# Altium PCB Stm32.PcbDoc
Units mm, origin at the board's own origin, x right, y up, seen from the top; angles counter-clockwise.
Board outline 45.1 x 45.1 mm, 2 copper layers (Top Layer, Bottom Layer); 38 components, 25 nets, 181 pads, 50 vias.
Unrouted connection lines stored in the file: 7.
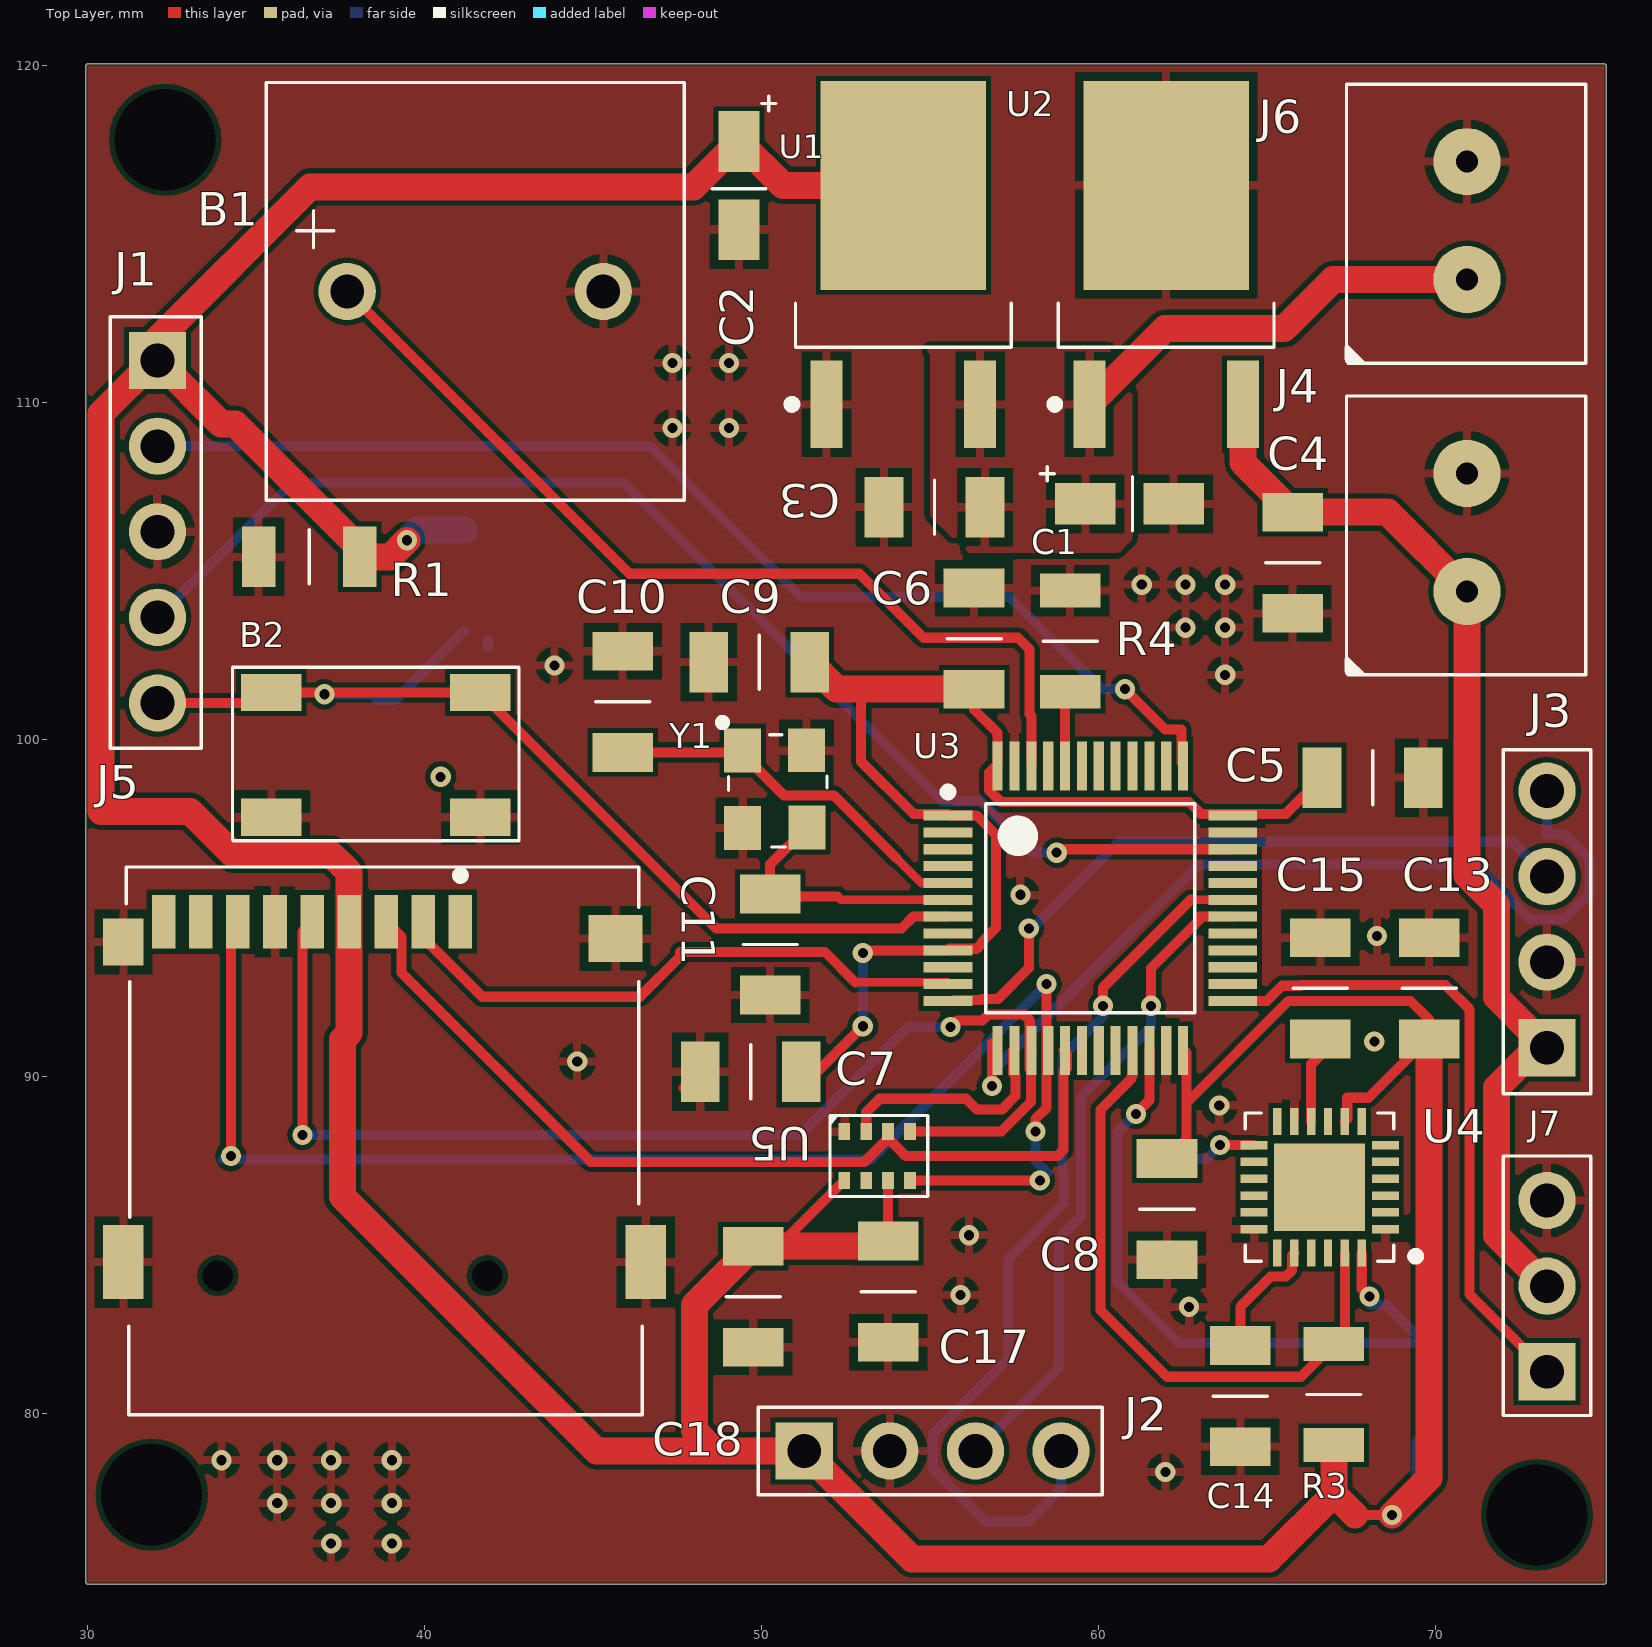
[diagram p0: Top Layer view]
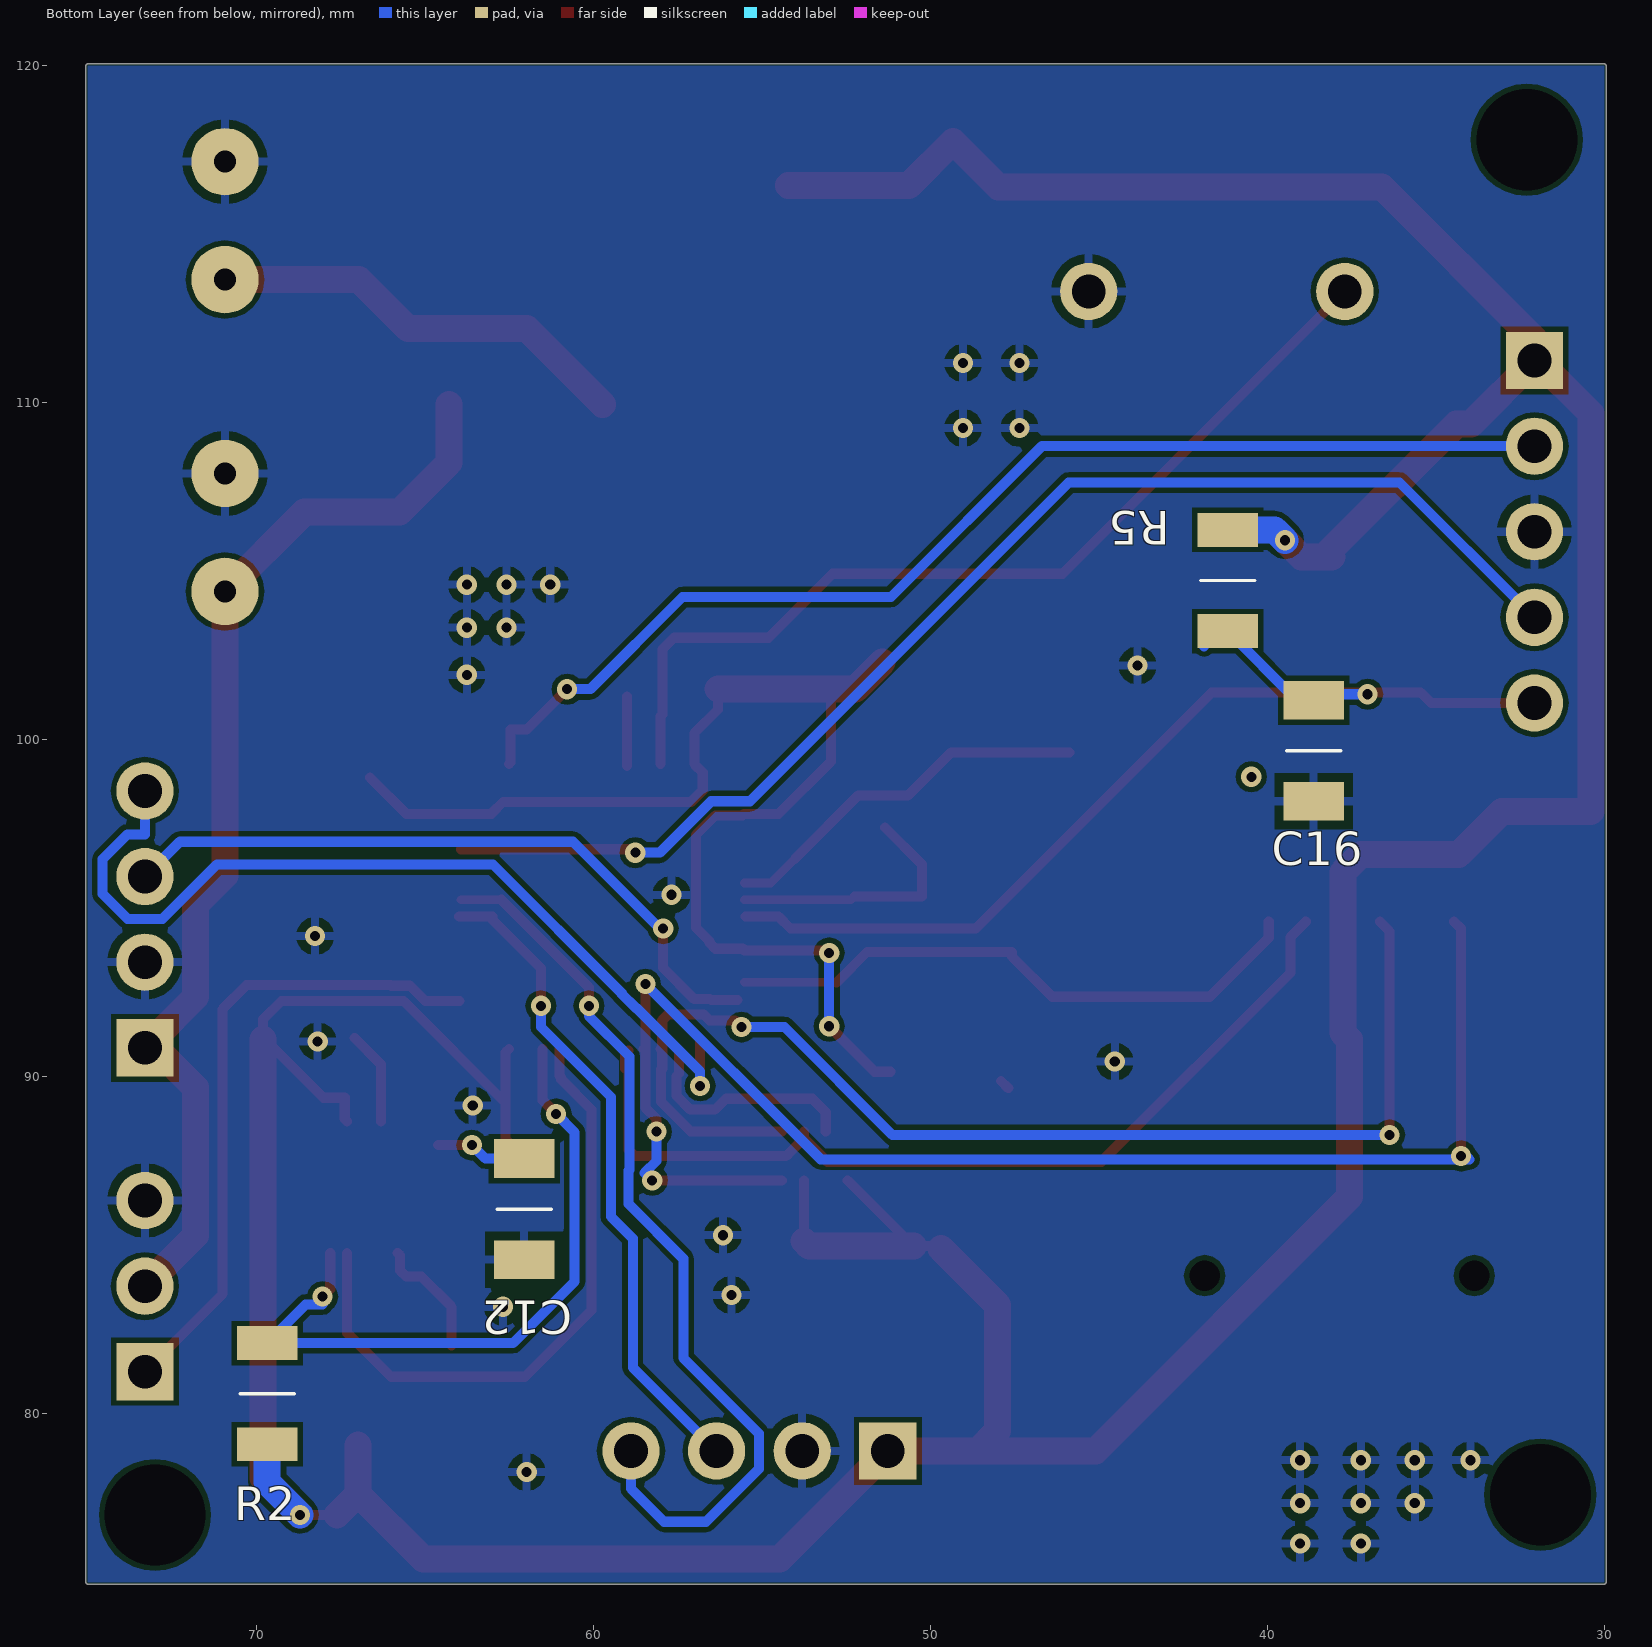
[diagram p1: Bottom Layer view, seen from below]
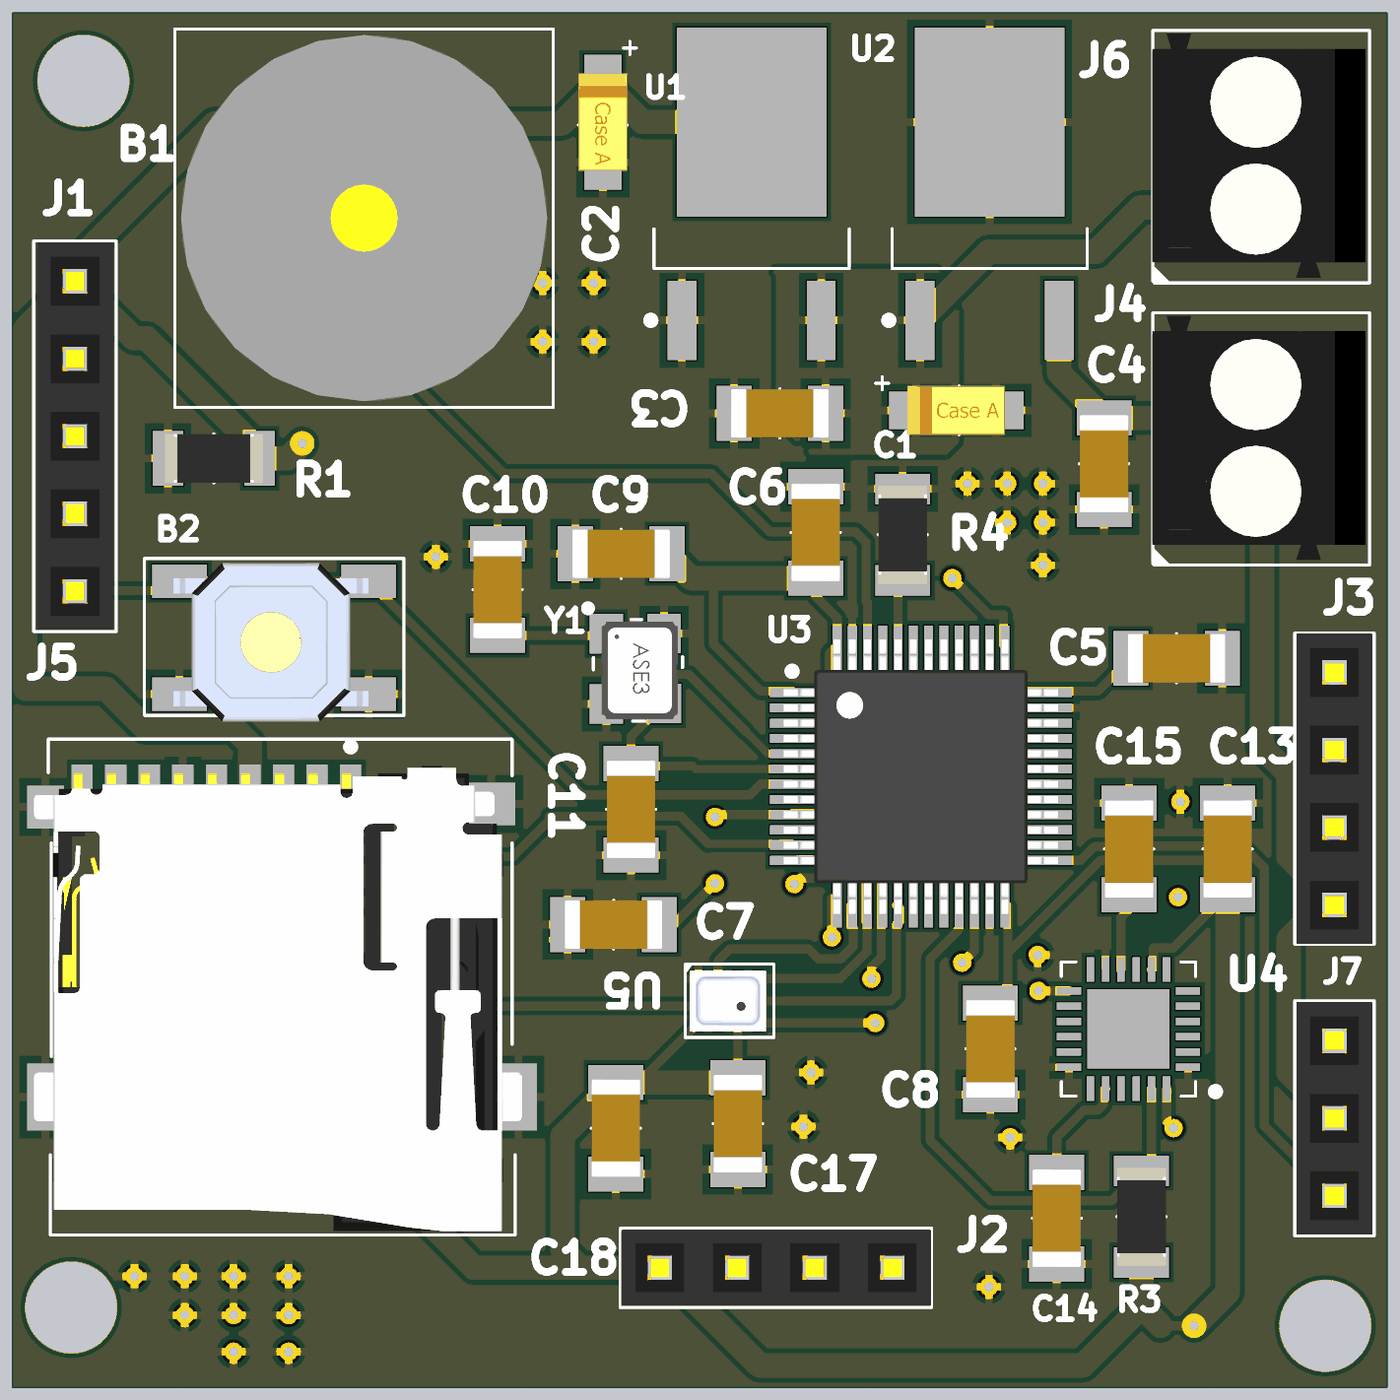
[diagram p2: 3D render of the assembled board from above, using the file's embedded part models]
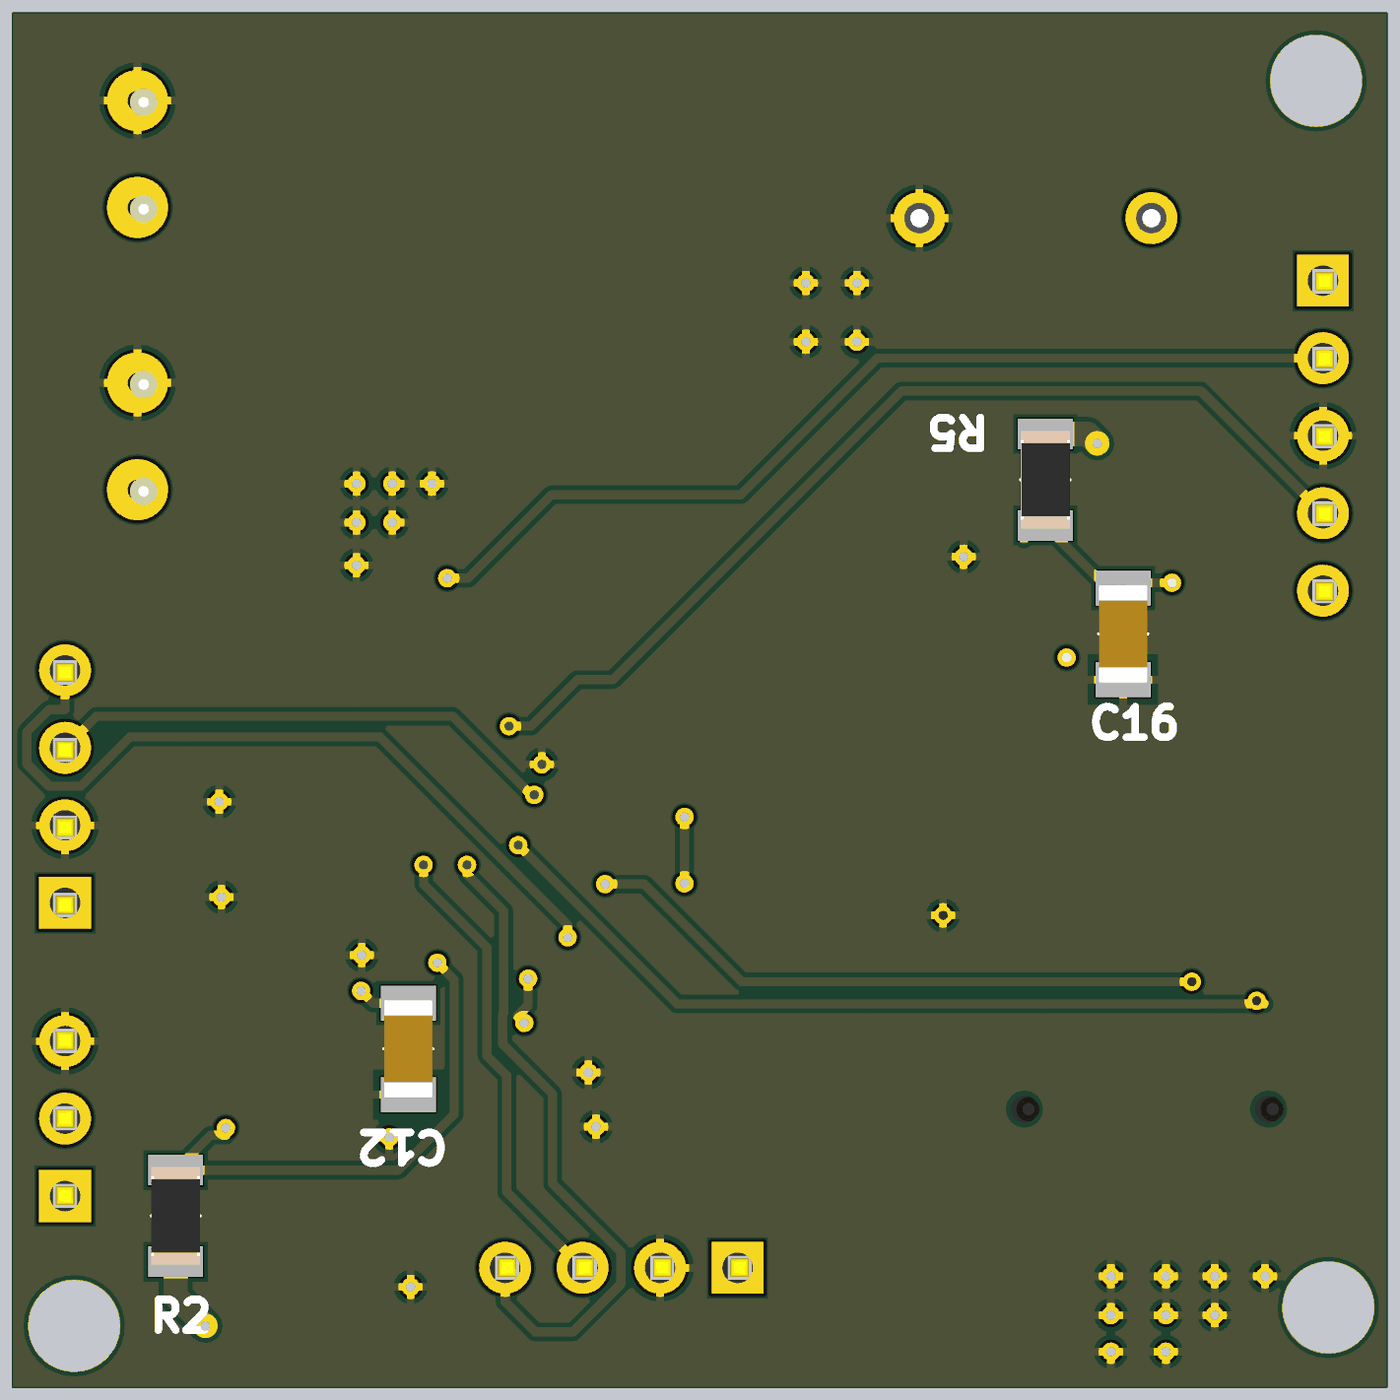
[diagram p3: 3D render of the assembled board from below, using the file's embedded part models]

## Layer stack, top to bottom
Top Solder: solder mask 0.0102, Solder Resist, Dk 3.5
Top Layer: signal copper 0.0356
Dielectric 1: dielectric 0.32, FR-4, Dk 4.8
Bottom Layer: signal copper 0.0356
Bottom Solder: solder mask 0.0102, Solder Resist, Dk 3.5

## Board outline
30,74.95 cw(c30,75) 29.95,75 29.95,120 cw(c30,120) 30,120.05 75,120.05 cw(c75,120) 75.05,120 75.05,75 cw(c75,75) 75,74.95

## Design rules (kind name [scope] priority, off if disabled: settings)
Clearance [All] p1: gap=0.254 ignorepadtopadclearanceinfootprint=FALSE except(0: Arc-Hole Track-Hole SMDPad-Hole THPad-Hole Via-Hole Fill-Hole Poly-Hole Region-Hole Text-Hole; 0.152: Arc-Track Arc-SMDPad Arc-Poly Track-Track Track-SMDPad Track-Poly SMDPad-SMDPad SMDPad-THPad SMDPad-Poly THPad-Poly Via-Poly Fill-Poly Poly-Poly)
HoleSize [All] p1: absolutevalues=TRUE maxlimit=3.1 minlimit=0.025 maxpercent=80.000 minpercent=20.000
MinimumSolderMaskSliver [All] p1: minsoldermaskwidth=0.1
PolygonConnect [All] p1: connectstyle=Relief reliefconductorwidth=0.254 reliefentries=4 polygonreliefangle="90 Angle" airgapwidth=0.254
RoutingVias [All] p1: holewidth=0.3 width=0.6 viastyle="Through Hole" minholewidth=0.2 minwidth=0.2 maxholewidth=0.9 maxwidth=1.27
SilkToSolderMaskClearance [IsPad] p1: minsilkscreentomaskgap=0.1 clearancetoexposedcopper=TRUE
SolderMaskExpansion [All] p1: expansion=0.102 istentingtop=FALSE
Width [All] p1: maxlimit=1 minlimit=0.254 preferedwidth=0.3 minimp=50.000000 maximp=50.000000 favimp=50.000000
27 further rules are at their usual default settings.

## Components (designator, comment, footprint, x,y, rotation, side; value= is the part's Value field where it differs from the comment)
B1 "BUZZER 5V" "BUZZER 5V" 37.7,113.3 r0 top
B2 "Push Button" "PUSB BUTTON-SMD" 35.45,101.4 r0 top
C1 "10uF TANTAL" "C1206- TANTAL" 61,107 r0 top
C2 "10uF TANTAL" "C1206- TANTAL" 49.325,116.35 r270 top
C3 "330 nF C1206" C1206 55.7,106.4 r180 top
C4 "0.1uF C1206" C1206 66.25,105.825 r270 top
C5 "0.1uF C1206" C1206 67.55,99.375 r0 top
C6 "0.1uF C1206" C1206 55.8,102.425 r90 top
C7 "0.1uF C1206" C1206 50.25,89.65 r180 top
C8 "0.1uF C1206" C1206 62.525,86.65 r270 top
C9 "0.1uF C1206" C1206 50.5,101.8 r180 top
C10 "16pF C1206" C1206 46.375,101.7 r270 top
C11 "16pF C1206" C1206 49.75,93.35 r90 top
C12 "0.1uF C1206" C1206 61.55,86.65 r270 bottom
C13 "0.1uF C1206" C1206 69.3,92.05 r90 top
C14 "2.2nF C1206" C1206 64.7,81.1 r270 top
C15 "0.1uF C1206" C1206 66.073,92.05 r90 top
C16 "0.1uF C1206" C1206 38.125,100.25 r270 bottom
C17 "0.1uF C1206" C1206 54.25,84.2 r270 top
C18 "0.1uF C1206" C1206 50.25,84.05 r270 top
J1 "HEADER 2.54 1x5" "HEADER 2.54 1x5" 32.075,111.25 r270 top
J2 "HEADER 2.54 1x4" "Header 2.54 1x4" 53.8,78.9 r0 top
J3 "HEADER 2.54 1x4" "Header 2.54 1x4" 73.3,93.4 r90 top
J4 "Klemens 1x2 3.5mm" "Klemens 1x2 - 3.5mm" 70.875,106 r90 top
J5 "Micro SD Card Holder" "Micro SD Kart Holder" 38.375,87.525 r0 top
J6 "Klemens 1x2 3.5mm" "Klemens 1x2 - 3.5mm" 70.875,115.25 r90 top
J7 "HEADER 2.54 1x3" "Header 2.54 1x3" 73.3,81.25 r90 top
R1 "10K R1206" "R1206 Resıstor" 36.5,105.425 r0 top
R2 "4.7K R1206" "R1206 Resıstor" 69.675,80.525 r90 bottom
R3 "4.7K R1206" "R1206 Resıstor" 66.975,80.5 r90 top
R4 "10K R1206" "R1206 Resıstor" 59.15,102.85 r90 top
R5 "10K R1206" "R1206 Resıstor" 41.175,104.8 r270 bottom
U1 "L108633 DPAK" DPAK228P972X230-3N 54.2,114.1 r90 top
U2 "L7805-DPAK" DPAK228P972X230-3N 62,114.1 r90 top
U3 "STM32F101" LQFP48-STM 59.75,95 r0 top
U4 "MPU6050" QFN50P400X400X90_HS-25N 66.55,86.725 r180 top
U5 "BMP280" BMP280 53.425,87.65 r0 top
Y1 "8 MHz 12.5 pf Osc" "8 MHZ Osc." 49.925,98.7 r270 top

## Footprints (in the part's own frame and the unit in brackets; to place one, negate y for a bottom-side part, rotate by r counter-clockwise, add the part's x,y. Pads: shape width x height; smd on the part's side, far side on the other; paste and mask are expansions set on the pad)
"8 MHZ Osc." [mm]
  rect 1.3x1.1 smd mask+0.05: 1(-0.981,-0.49) 2(1.319,-0.49) 3(1.303,1.417) 4(-0.986,1.401)
  silkscreen extent -1.91,-1.19 1.88,2.01, body extent -1.38,-0.64 1.82,1.86, height 1.22
BMP280 [mm]
  rect 0.35x0.5 smd mask+0.05: 1(-0.975,0.725) 2(-0.325,0.725) 3(0.325,0.725) 4(0.975,0.725) 5(0.975,-0.725) 6(0.325,-0.725) 7(-0.325,-0.725) 8(-0.975,-0.725)
  silkscreen extent -1.4,-1.2 1.5,1.2, body extent -1.25,-1 1.25,1, height 0.95
"BUZZER 5V" [mm]
  round 1.7 hole 1: 1(0,0) 2(7.6,0)
  silkscreen extent -2.4,-6.2 10,6.2, body extent -2.2,-6 9.8,6, height 9.5
C1206 [mm]
  rect 1.15x1.8 smd mask+0.05: 1(-0.925,-0.5) 2(2.075,-0.5)
  silkscreen extent 0.58,-1.3 0.58,0.31, body extent -1.02,-1.3 2.18,0.3, height 1
"C1206- TANTAL" [mm]
  rect 1.8x1.23 smd mask+0.05: 1(-1.4,0) 2(1.22,0)
  silkscreen extent -2.74,-0.8 0,1.1, body extent -1.7,-0.8 1.5,0.8, height 1.62
DPAK228P972X230-3N [mm] "D-PAK, 3-Pads, Body 6,40x6,56mm (max), IPC Medium Density"
  rect 2.6x0.95 smd mask+0.05: 1(-4.15,2.28) 2(-4.15,-2.28)
  rect 6.2x4.9 smd mask+0.05: 3(2.35,0)
  silkscreen extent -4.27,-3.2 -1.15,3.43, body extent -2.5,-3.2 4.1,3.2, height 2.3
"Header 2.54 1x3" [mm]
  rect 1.7x1.7 hole 1: 1(0,0)
  round 1.7 hole 1: 2(2.54,0) 3(5.08,0)
  silkscreen extent -1.3,-1.3 6.4,1.3, body extent -1.26,-1.25 6.36,1.25, height 9.1
"Header 2.54 1x4" [mm]
  rect 1.7x1.7 hole 1: 1(-2.54,0)
  round 1.7 hole 1: 2(0,0) 3(2.54,0) 4(5.08,0)
  silkscreen extent -3.9,-1.3 6.3,1.3, body extent -3.88,-1.25 6.28,1.25, height 9.1
"HEADER 2.54 1x5" [mm]
  rect 1.7x1.7 hole 1: 1(0,0)
  round 1.7 hole 1: 2(2.54,0) 3(5.08,0) 4(7.62,0) 5(10.16,0)
  silkscreen extent -1.3,-1.4 11.5,1.3, body extent -1.25,-1.3 11.45,1.2, height 9.1
"Klemens 1x2 - 3.5mm" [mm]
  round 2 hole 0.65: 1(-1.6,-0.05) 2(1.9,-0.05)
  silkscreen extent -4.11,-3.58 4.2,3.58, body extent -3.9,-3.45 4.09,3.55, height 8.9
LQFP48-STM [mm] "TSQFP, 48-Leads, Body 7,00x7,00mm, Pitch 0,50mm, IPC Medium Density"
  rect 1.45x0.3 smd mask+0.05: 1(-4.225,2.75) 2(-4.225,2.25) 3(-4.225,1.75) 4(-4.225,1.25) 5(-4.225,0.75) 6(-4.225,0.25) 7(-4.225,-0.25) 8(-4.225,-0.75) 9(-4.225,-1.25) 10(-4.225,-1.75) 11(-4.225,-2.25) 12(-4.225,-2.75) 25(4.225,-2.75) 26(4.225,-2.25) 27(4.225,-1.75) 28(4.225,-1.25) 29(4.225,-0.75) 30(4.225,-0.25) 31(4.225,0.25) 32(4.225,0.75) 33(4.225,1.25) 34(4.225,1.75) 35(4.225,2.25) 36(4.225,2.75)
  rect 0.3x1.45 smd mask+0.05: 13(-2.75,-4.225) 14(-2.25,-4.225) 15(-1.75,-4.225) 16(-1.25,-4.225) 17(-0.75,-4.225) 18(-0.25,-4.225) 19(0.25,-4.225) 20(0.75,-4.225) 21(1.25,-4.225) 22(1.75,-4.225) 23(2.25,-4.225) 24(2.75,-4.225) 37(2.75,4.225) 38(2.25,4.225) 39(1.75,4.225) 40(1.25,4.225) 41(0.75,4.225) 42(0.25,4.225) 43(-0.25,4.225) 44(-0.75,4.225) 45(-1.25,4.225) 46(-1.75,4.225) 47(-2.25,4.225) 48(-2.75,4.225)
  silkscreen extent -4.35,-3.1 3.1,3.57, body extent -4.5,-4.5 4.5,4.5, height 1.6
"Micro SD Kart Holder" [mm]
  rect 0.7x1.6 smd paste+0 mask+0: 1(2.684,7.075) 2(1.584,7.075) 3(0.484,7.075) 4(-0.616,7.075) 5(-1.716,7.075) 6(-2.816,7.075) 7(-3.916,7.075) 8(-5.016,7.075) Cd(-6.116,7.075)
  rect 1.2x1.4 smd paste+0 mask+0: 10(-7.316,6.475)
  rect 1.6x1.4 smd paste+0 mask+0: 11(7.284,6.575)
  rect 1.2x2.2 smd paste+0 mask+0: 12(-7.316,-3.025) 13(8.184,-3.025)
  round 0 hole 0.9 unplated paste-1000 mask+0: ""(-4.516,-3.425) ""(3.484,-3.425)
  silkscreen extent -7.22,-7.55 8.08,8.7, body extent -7.7,-7.42 8.3,7.82, height 1.85
"PUSB BUTTON-SMD" [mm]
  rect 1.8x1.1 smd mask+0.05: 1(0,0) 2(6.2,0) 3(0,-3.7) 4(6.2,-3.7)
  silkscreen extent -1.15,-4.4 7.35,0.75, body extent -0.2,-4.6 6.2,0.6, height 1.5
QFN50P400X400X90_HS-25N [mm] "QFN, 24-Leads, Body 4,00x4,00mm, Pitch 0,50mm, Thermal Pad 2,70x2,60mm, IPC Medium Density"
  rect 0.8x0.25 smd mask+0.05: 1(-1.95,1.25) 2(-1.95,0.75) 3(-1.95,0.25) 4(-1.95,-0.25) 5(-1.95,-0.75) 6(-1.95,-1.25) 13(1.95,-1.25) 14(1.95,-0.75) 15(1.95,-0.25) 16(1.95,0.25) 17(1.95,0.75) 18(1.95,1.25)
  rect 0.25x0.8 smd mask+0.05: 7(-1.25,-1.95) 8(-0.75,-1.95) 9(-0.25,-1.95) 10(0.25,-1.95) 11(0.75,-1.95) 12(1.25,-1.95) 19(1.25,1.95) 20(0.75,1.95) 21(0.25,1.95) 22(-0.25,1.95) 23(-0.75,1.95) 24(-1.25,1.95)
  rect 2.7x2.6 smd mask+0.05: 25(0,0)
  silkscreen extent -2.98,-2.2 2.2,2.2, body extent -2.05,-2.05 2.05,2.05, height 0.9
"R1206 Resıstor" [mm]
  rect 1x1.8 smd mask+0.05: 1(-1.425,0) 2(1.575,0)
  silkscreen extent 0.08,-0.8 0.08,0.81, body extent -1.52,-0.8 1.68,0.81, height 0.55

## Part data
B1: "BUZZER 5v"
B2: "Smd Push Button"
C3: "330nF C1206"
C14: "10nF C1206"
U1: "LD1086 3.3V REGULATOR"
U2: "L7805 5V REGULATÖR SMD PAKET"
U3: "STM32F101 48 PİNLİ MİKROİŞLEMCİ"
U4: "MPU6050 GYRO"
U5: "BMP280 SENSOR"

## Free pads (board coordinates)
  rect 0x0 hole 3: 0(31.9,77.6) 0(32.3,117.8) 0(73,77)

## Via types
v1: diameter 0.6, hole 0.3, Top Layer to Bottom Layer, 50 vias

## Nets (pads, with @x,y where several pads share a name; then routed paths per layer and width w, separated by ;. In a path a pad name is that pad's centre, name@x,y a point inside that pad or via, vN(x,y) a via of type N, cw(c..) or ccw(c..) an arc to the next point about the centre after c; other vN are vias at no path point)
3.3V: C2.1 C5.1 C6.1 C7.1 C8.1 C9.1 C12.1 C13.1 C17.1 C18.1 J1.1 J2.1 J5.4 R1.2 R2.1 R3.1 R5.1 U1.3 U3.1 U3.9 U3.24 U3.36 U3.48 U4.8 U4.13 U5.6 U5.8 | length 200
  Top Layer w0.3: C18.1 50.5,84.975 U5.8 ; C7.1 51.65,90.15 v1(53,91.5) ; 52.95,101.5 52.95,99.35 54.5,97.8 55.525,97.8 55.573,97.752 56.375,97.752 56.95,97.177 56.95,94.423 56.552,94.025 56.552,93.975 56.375,93.798 55.573,93.798 U3.9 ; v1(53,93.675) 53.077,93.752 55.477,93.752 U3.9@55.5,93.775 ; C17.1 U5.6 ; C6.1 56.3,100.9 57,100.2 57,99.275 56.75,99.025 56.75,98.5 57.102,98.148 62.673,98.148 62.675,98.15 63.025,97.8 65.55,97.8 ; C8.1 62.6,88.15 ; U3.24@62.5,90.825 62.6,90.725 62.6,89.225 ; v1(63.6,87.975) U4.13 ; U3.36@63.975,97.8 65.55,97.8 ; C5.1 65.55,97.8 ; U4.8 67.373,88.748 67.373,89.377 68.002,89.377 C13.1@69.75,91.125 ; 67.6,77 v1(68.7,77) ; C13.1 69.8,91.7 69.25,92.25 65.625,92.25 62.6,89.225 ; 62.6,88.15 62.6,89.225 ; 62.6,88.15 62.6,89.225
  Top Layer w0.8: J1.1 33.963,109.362 34.388,109.362 R1.2@38.125,105.625 ; R1.2 38.982,105.425 v1(39.475,105.918) ; C18.1@49.675,84.9 48,83.225 48,79.5 48.6,78.9 ; C18.1@50.5,84.975 53.6,84.975 C17.1 ; C9.1 52.225,101.5 52.95,101.5 C6.1 ; U1.3 50.625,116.45 C2.1 47.975,116.4 36.6,116.4 32.05,111.85 32.05,111.325 30.4,109.675 30.4,97.875 33.044,97.875 34.321,96.598 37.227,96.598 37.759,96.066 J5.4 37.759,91.3 37.559,91.1 37.559,86.441 45.1,78.9 48.6,78.9 ; R3.1 66.975,77.625 ; 67.6,77 66.975,77.625 ; v1(68.7,77) 69.8,78.1 C13.1 ; 48.6,78.9 J2.1 54.46,75.7 65.05,75.7 66.975,77.625
  Bottom Layer w0.3: v1(53,91.5) v1(53,93.675) ; C12.1 63.2,87.575 v1(63.6,87.975)
  Bottom Layer w0.8: v1(39.475,105.918) 39.782,106.225 R5.1 ; v1(68.7,77) 69.675,77.975 R2.1
5V: C4.1 J3.1 J4.1 J7.2 U2.2 | length 32.5
  Top Layer w0.8: U2.2 64.28,108.22 C4.1 68.575,106.75 J4.1 70.925,95.975 71.796,95.104 71.796,92.364 73,91.16 72.96,91.12 72.96,90.84 71.796,89.676 71.796,85.294 J7.2
7.4V: C1.1 C3.1 J6.1 U1.2 U2.1 | length 12.7
  Top Layer w0.8: U2.1 61.97,112.2 65.5,112.2 66.95,113.65 J6.1
GND: B1.2 B2.3 B2.4 C1.2 C2.2 C3.2 C4.2 C5.2 C6.2 C7.2 C8.2 C9.2 C10.1 C11.1 C12.2 C13.2 C14.2 C15.2 C16.2 C17.2 C18.2 J1.3 J2.2 J3.2 J4.2 J5.6 J5.10 J5.11 J5.12 J5.13 J6.2 J7.3 R1.1 R4.2 U1.1 U2.3 U3.8 U3.23 U3.35 U3.47 U4.1 U4.9 U4.11 U4.18 U5.1 U5.7 Y1.2 Y1.4 | length 0.3
  Top Layer w0.3: C7.2@47.687,89.663 C7.2@47.9,89.875
  other v1: 37.225,76.15 39.025,76.15 35.625,77.35 37.225,77.35 39.025,77.35 61.975,78.275 33.975,78.625 35.625,78.625 37.225,78.625 39.025,78.625 62.675,83.175 55.9,83.525 56.15,85.3 63.575,89.15 44.525,90.45 68.175,91.05 68.25,94.175 57.675,95.4 63.75,101.925 43.85,102.2 62.575,103.325 63.75,103.325 61.275,104.6 62.575,104.6 63.75,104.6 47.35,109.25 49.025,109.25 47.35,111.175 49.025,111.175
NetB1_1: B1.1 U3.46 | length 28.1
  Top Layer w0.3: B1.1 46.075,104.925 52.9,104.925 54.8,103.025 57.6,103.025 57.948,102.677 57.948,100.748 58,100.696 U3.46@58,99.275
NetC10_2: C10.2 U3.5 Y1.1 | length 11.3
  Top Layer w0.254: 54,96.485 54.735,95.75 U3.5
  Top Layer w0.3: C10.2 49.379,99.625 50.655,98.349 52.136,98.349 54,96.485
NetC11_2: C11.2 U3.6 Y1.3 | length 7.8
  Top Layer w0.254: 52.25,95.348 52.348,95.25 U3.6
  Top Layer w0.3: Y1.3 50.25,96.304 C11.2 50.25,95.348 52.25,95.348
NetC14_1: C14.1 U4.20 | length 3.7
  Top Layer w0.3: C14.1 64.2,83.175 65.098,84.073 65.55,84.073 65.727,84.25 65.727,84.702 U4.20
NetC15_1: C15.1 U4.10 | length 2.8
  Top Layer w0.3: U4.10 66.3,90.375 C15.1@67.075,91.15
NetJ1_2: J1.2 U3.37 | length 34.9
  Top Layer w0.3: v1(60.775,101.5) 61.973,100.302 62.452,100.302 62.452,99.323 U3.37@62.5,99.275
  Bottom Layer w0.3: J1.2 46.69,108.71 51.165,104.235 57.35,104.235 60.085,101.5 v1(60.775,101.5)
NetJ1_4: J1.4 U3.34 | length 38.1
  Top Layer w0.3: v1(58.75,96.65) 58.852,96.752 U3.34@63.927,96.752
  Bottom Layer w0.3: J1.4 36.079,107.634 45.891,107.634 55.35,98.175 56.5,98.175 58.025,96.65 v1(58.75,96.65)
NetJ2_3: J2.3 U3.30 | length 19.6
  Top Layer w0.3: v1(61.553,92.104) 61.553,93.228 63.077,94.752 ; 62.985,94.752 U3.30@63.975,94.752
  Bottom Layer w0.3: J2.3 56.35,78.9 58.825,81.375 58.825,85.2 59.475,85.85 59.475,89.4 61.55,91.475 61.55,92.101 v1(61.553,92.104)
NetJ2_4: J2.4 U3.31 | length 27.2
  Top Layer w0.254: 62.727,95.252 U3.31@63.927,95.252
  Top Layer w0.3: v1(60.128,92.104) 60.128,92.653 62.727,95.252
  Bottom Layer w0.3: J2.4 58.88,77.78 57.9,76.8 56.653,76.8 55.086,78.367 55.086,79.419 57.325,81.658 57.325,84.6 58.954,86.229 58.954,87.217 58.927,87.244 58.927,87.806 58.925,87.806 58.925,90.6 60.128,91.803 v1(60.128,92.104)
NetJ3_3: J3.3 U3.12 | length 20.6
  Top Layer w0.3: U3.12@55.725,92.275 56.509,92.275 56.538,92.304 57.004,92.304 57.925,93.225 v1(57.925,94.4)
  Bottom Layer w0.3: v1(57.925,94.4) 58.025,94.4 60.6,96.975 72.265,96.975 J3.3
NetJ3_4: J3.4 U3.13 | length 26.8
  Top Layer w0.3: v1(56.828,89.729) 56.828,90.997
  Bottom Layer w0.3: v1@56.828,89.75 56.828,90.153 58.721,92.046 58.742,92.046 59.154,92.458 59.154,92.479 62.975,96.3 71.167,96.3 72.781,94.686 73.819,94.686 74.554,95.421 74.554,96.459 73.819,97.194 73.3,97.194 J3.4
NetJ5_2: J5.2 U3.11 | length 17.8
  Top Layer w0.254: 52.777,92.8 U3.11@55.525,92.8
  Top Layer w0.3: J5.2 39.959,94.123 41.709,92.373 46.384,92.373 47.575,93.564 47.575,93.7 51.877,93.7 52.777,92.8
NetJ5_3: J5.3 U3.17 U5.3 | length 27.5
  Top Layer w0.3: J5.3 39.307,94.152 39.307,93.093 44.923,87.477 53.054,87.477 U5.3@53.75,88.173 ; U5.3 U5.3@53.75,88.173 ; U3.17@58.952,90.777 59.048,90.681 59.048,90.25 58.952,90.154 58.952,87.831 58.767,87.646 54.277,87.646 54.1,87.823 U5.3@53.75,88.173
NetJ5_5: J5.5 U3.15 U5.4 | length 36
  Top Layer w0.3: v1(36.375,88.275) 36.375,94.316 J5.5 ; U5.4 57.108,88.375 57.984,89.251 57.984,90.208 57.952,90.24 57.952,90.777 58,90.825 57.952,90.873 57.952,91.675 57.775,91.852 56.725,91.852 56.548,91.675 55.8,91.675 v1(55.6,91.475)
  Bottom Layer w0.3: v1(36.375,88.275) 51.125,88.275 54.325,91.475 v1(55.6,91.475)
NetJ5_7: J5.7 U3.16 U5.5 | length 44
  Top Layer w0.3: v1(34.25,87.65) 34.25,94.391 J5.7 ; U5.5 v1(58.25,86.925) ; v1(58.125,88.375) 58.125,88.753 58.452,89.08 58.452,90.777 58.5,90.825 58.452,90.873 58.452,92.748 v1(58.45,92.75)
  Bottom Layer w0.3: v1(34.25,87.65) 34.1,87.65 34,87.55 53.25,87.55 v1(58.45,92.75) ; v1(58.125,88.375) 58.125,87.5 58.475,87.15 v1(58.25,86.925)
NetJ7_1: J7.1 U3.25 | length 19.2
  Top Layer w0.3: U3.25 64.986,92.25 65.438,92.702 65.977,92.702 66,92.725 70.279,92.725 71.002,92.002 71.002,90.425 71,90.423 71,83.55 J7.1
NetR2_2: R2.2 U3.22 U4.24 | length 20.9
  Top Layer w0.3: v1(61.1,88.9) 61.5,89.3 U3.22@61.5,90.825 ; U4.24 67.8,83.707 v1(68.028,83.479)
  Bottom Layer w0.3: v1(61.1,88.9) 60.55,88.35 60.55,83.925 62.375,82.1 R2.2 68.528,83.247 68.028,83.247 v1(68.028,83.479)
NetR3_2: R3.2 U3.21 U4.23 | length 19.1
  Top Layer w0.3: U3.21@61,90.825 U3.21 61,90.023 60.952,89.975 60.952,89.925 60.05,89.023 60.05,83.075 62.025,81.1 66,81.1 R3.2 67.3,82.4 U4.23
NetR4_1: R4.1 U3.44 | length 2
  Top Layer w0.3: U3.44 R4.1@59,101.275
NetU3_14: U3.14 U5.2 | length 6.9
  Top Layer w0.3: U5.2 53.1,88.95 53.5,89.35 56.059,89.35 56.384,89.025 57.119,89.025 57.532,89.438 57.532,90.021 57.452,90.101 U3.14@57.452,90.777
NRST: B2.1 B2.2 C16.1 J1.5 R5.2 U3.7 | length 32.3
  Top Layer w0.3: J1.5@32.415,100.75 J1.5 35.14,101.09 B2.1 37.025,101.4 B2.2 48.65,94.4 54.146,94.4 54.498,94.752 U3.7@55.477,94.752
  Bottom Layer w0.3: v1(37.025,101.35) 38.45,101.35 C16.1 39.125,101.175 R5.2 ; R5.2@41.875,102.775 R5.2@41.875,102.975
pads on no net: J5. J5.1 J5.8 J5.Cd U3.2 U3.3 U3.4 U3.10 U3.18 U3.19 U3.20 U3.26 U3.27 U3.28 U3.29 U3.32 U3.33 U3.38 U3.39 U3.40 U3.41 U3.42 U3.43 U3.45 U4.2 U4.3 U4.4 U4.5 U4.6 U4.7 U4.12 U4.14 U4.15 U4.16 U4.17 U4.19 U4.21 U4.22 U4.25
copper on no net:
  other v1: 40.475,98.9

## Polygon pours and split planes (outlines as drawn)
GND on Top Layer "GND_L01_P008" (solid, pour order 8): 30,120 75,120 75,75 30,75 30,120
7.4V on Top Layer "7.4V_L01_P006" (solid, pour order 6): 54.793,111.641 60.493,111.641 60.993,111.141 60.993,110.84 60.993,105.94 60.593,105.541 60.393,105.541 56.093,105.541 54.993,106.641 54.993,111.441
GND on Bottom Layer "GND_L02_P010" (solid, pour order 10): 30,120 75,120 75,75 30,75 30,120

## Silkscreen, mask and mechanical layers (free items; w line width, h text height)
Mechanical 1:
  lines w0.1: 75,75 30,75 30,120 75,120 ; 75,75 75,120 ; 75,75 75,120